# Allegro board FishTank-Manage.brd
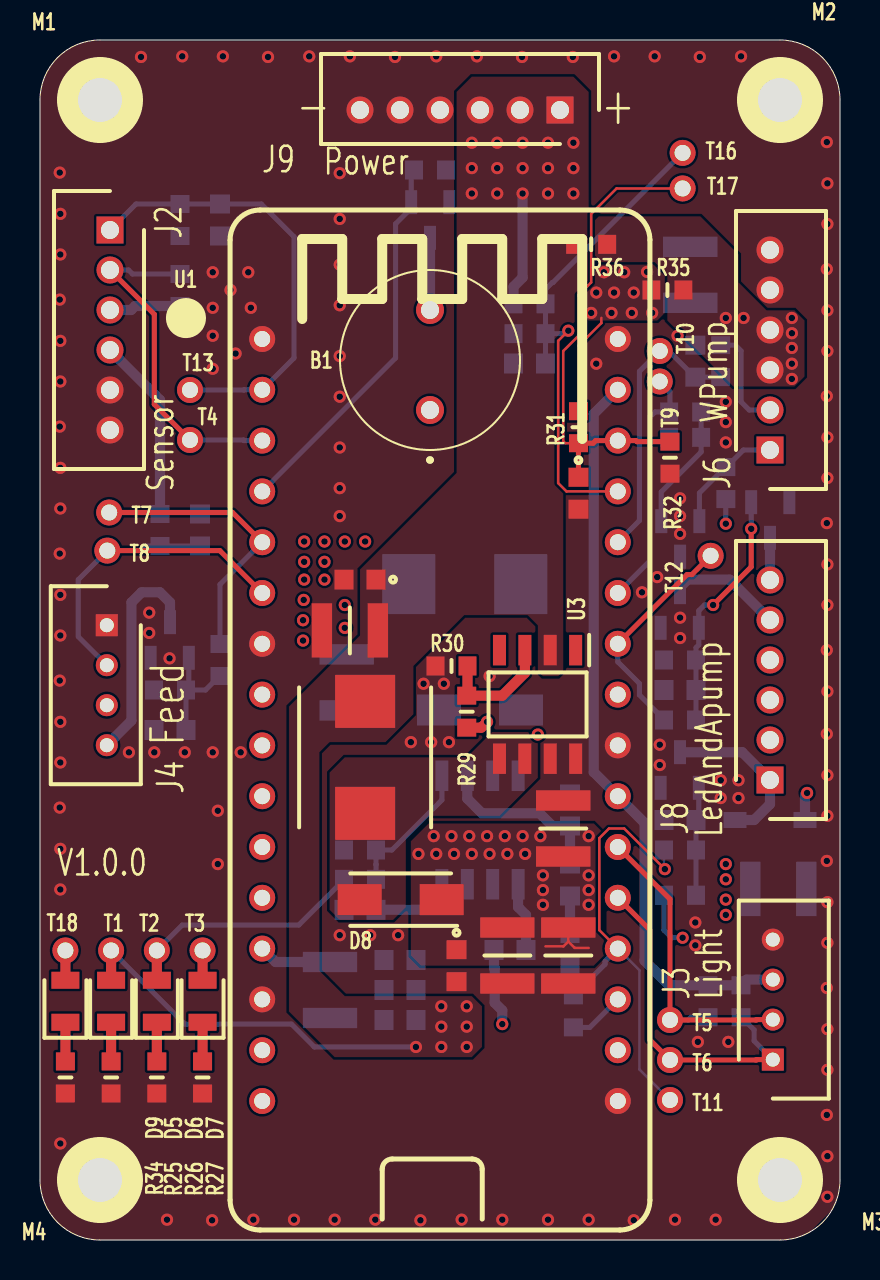
[diagram p0: board, top side]
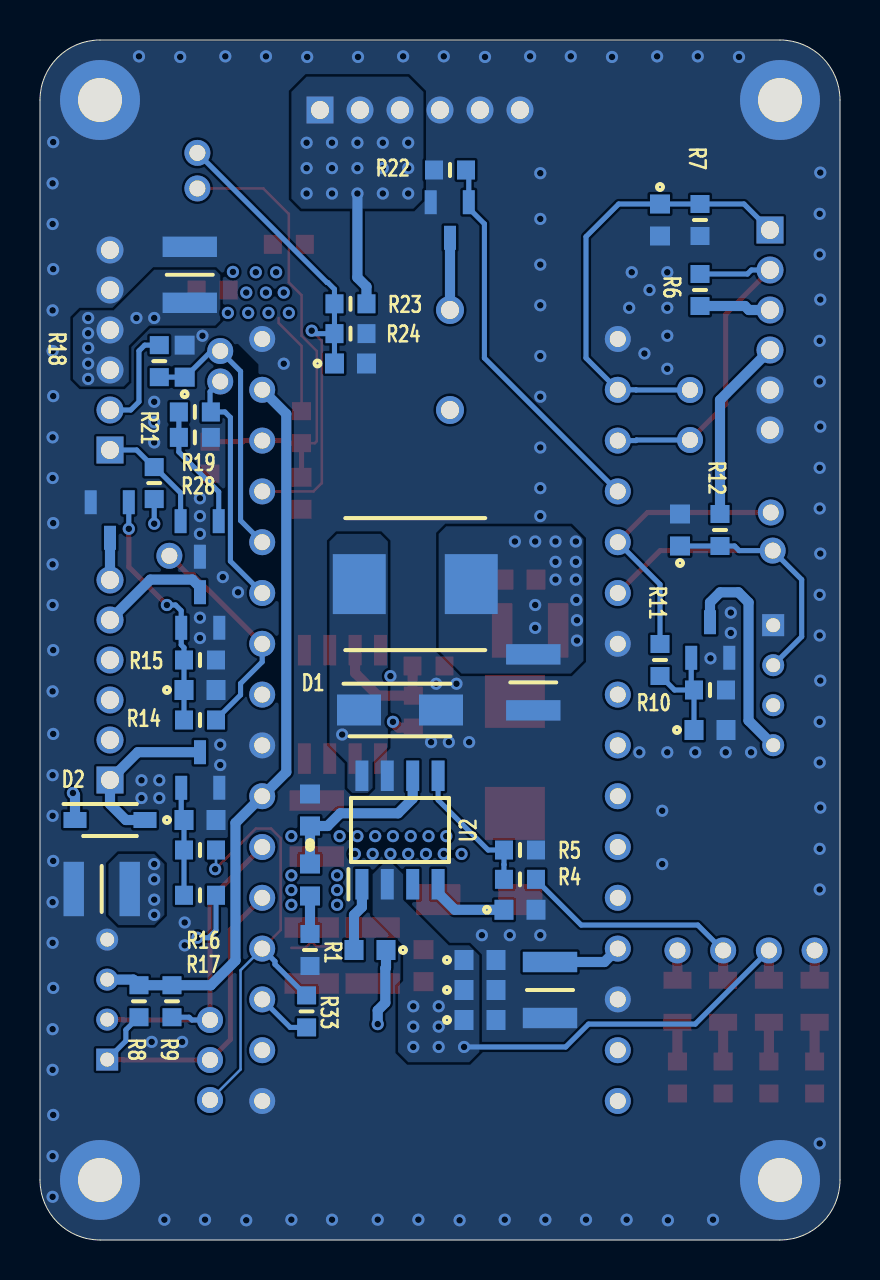
[diagram p1: board, bottom side, seen from below]

Outline 40 x 60 mm; copper layers: TOP, POW, GND, BOTTOM. Coordinates in mm from the lower left corner of the outline.
Outline path: 0,57 0,3 arc(0.88,0.88) 3,0 37,0 arc(39.12,0.88) 40,3 40,57 arc(39.12,59.12) 37,60 3,60 arc(0.88,59.12) 0,57

## Design rules (mm)
constraint set DEFAULT: min track width 0.127

## Placement (name value [footprint] x y rotation side)
B1  Buzz  [CST931AP]  19.5 42 0 top
C1  4.7uF  [C0603]  18 12.5 180 bottom
C2  4.7uF  [C0603]  18 14 180 bottom
C3  10nF  [C0603]  18 11 180 bottom
C4  10nF  [C0603]  16 16.51 180 bottom
C5  4.7uF  [C0603]  23.5 14.5 0 bottom
C6  4.7nF  [C0603]  26.5 18 270 bottom
C7  39pF  [C0603]  26.5 21.5 90 bottom
C8  100uF  [C1210]  15.34 27.88 270 bottom
C13  10uF  [C0603]  9 51 270 bottom
C14  4.7nF  [C0603]  6.5 25.5 180 bottom
C15  4.7nF  [C0603]  8 35.5 90 bottom
C17  4.7nF  [C0603]  32 27.5 180 bottom
C18  4.7nF  [C0603]  32 21 180 bottom
C19  100uF  [C1210]  32.51 48.26 90 bottom
C22  22uF  [C1210]  14.5 12.5 270 bottom
C23  100uF  [C1210]  36.91 17.55 0 bottom
C25  4.7nF  [C0603]  24.48 43.83 180 bottom
C26  100uF  [C1210]  23.37 14.22 270 top
C27  100uF  [C1210]  26.42 14.22 270 top
C28  100uF  [C1210]  26.16 20.57 90 top
C29  1uF  [C0603]  20.83 13.72 270 top
C30  100uF  [C1210]  15.49 30.48 180 top
C31  1uF  [C0603]  16 33.02 180 top
C32  4.7nF  [C0603]  26.92 37.34 270 top
C33  100nF  [C0603]  32.77 43.94 90 bottom
D1  S310  [DO-214AC]  22 26.5 180 bottom
D2  MBR0520  [SOD-123]  36.5 21 180 bottom
D5  LED  [LED-0805]  3.56 11.94 90 top
D6  LED  [LED-0805]  5.84 11.94 90 top
D7  LED  [LED-0805]  8.13 11.94 90 top
D8  S310  [DO-214AC]  18.03 17.02 180 top
D9  LED  [LED-0805]  1.27 11.94 90 top
J2  PH-6  [B6BPHKSLFSN]  3.5 50.5 90 top
J3  PH-4  [B4BPHKSLFSN]  36.64 9.02 270 top
J4  PH-4  [B4BPHKSLFSN]  3.34 30.74 90 top
J6  PH-6  [B6BPHKSLFSN]  36.5 39.5 270 top
J8  PH-6  [B6BPHKSLFSN]  36.5 23 270 top
J9  PH-6  [B6BPHKSLFSN]  26 56.5 0 top
L1  6.8uH  [H0630]  21.24 32.8 180 bottom
L2  6.8uH  [H0630]  16.26 24.13 270 top
M1  -  [M2]  3 57 0 top
M2  -  [M2]  37 57 0 top
M3  -  [M2]  37 3 0 top
M4  -  [M2]  3 3 0 top
NOREF  -  []  40 0 90 top
NOREF#2  -  []  3 3 90 top
NOREF#3  -  []  3 57 0 top
NOREF#4  -  []  0 0.99 0 top
Q1  MOSFET N  [SOT23]  6.5 30 90 bottom
Q2  MOSFET N  [SOT23]  32 31.5 90 bottom
Q3  MOSFET N  [SOT23]  32 23.5 90 bottom
Q4  MOSFET N  [SOT23]  19.5 51 270 bottom
Q5  MOSFET N  [SOT23]  36.5 36 270 bottom
Q6  MOSFET N  [SOT23]  32 35.05 270 bottom
R1  49.9K  [R0603]  26.5 14.5 270 bottom
R4  10K  [R0603]  16 18.03 180 bottom
R5  1.91K  [R0603]  16 19.5 0 bottom
R6  10K  [R0603]  7 47.5 270 bottom
R7  500K  [R0603]  7 51 90 bottom
R8  10K  [R0603]  35.05 11.94 270 bottom
R9  10K  [R0603]  33.4 11.94 270 bottom
R10  10K  [R0603]  6.5 27.5 0 bottom
R11  220R  [R0603]  9 29 90 bottom
R12  10K  [R0603]  6 35.5 90 bottom
R14  220R  [R0603]  32 26 180 bottom
R15  10K  [R0603]  32 29 0 bottom
R16  220R  [R0603]  32 19.5 180 bottom
R17  10K  [R0603]  32 17.24 180 bottom
R18  2K  [R0603]  34.04 43.94 270 bottom
R19  220R  [R0603]  32.26 41.4 180 bottom
R21  4.7K  [R0603]  34.29 37.85 270 bottom
R22  10K  [R0603]  19.5 53.5 0 bottom
R23  6.8K  [R0603]  24.48 46.81 180 bottom
R24  1K  [R0603]  24.48 45.32 0 bottom
R25  1K  [R0603]  3.56 8.13 90 top
R26  1K  [R0603]  5.84 8.13 90 top
R27  1K  [R0603]  8.13 8.13 90 top
R28  4.7K  [R0603]  32.26 40.13 0 bottom
R29  9.1K  [R0603]  21.34 26.42 90 top
R30  1K  [R0603]  20.57 28.7 180 top
R31  6.8K  [R0603]  26.92 40.64 90 top
R32  1K  [R0603]  31.5 39.12 90 top
R33  0R  [R0603]  26.67 11.43 90 bottom
R34  1K  [R0603]  1.27 8.13 90 top
R35  0R  [R0603]  31.37 47.5 180 top
R36  0R  [R0603]  27.56 49.78 180 top
T1  TestPoint  [TESTPOINT]  3.56 14.48 0 top
T2  TestPoint  [TESTPOINT]  5.84 14.48 0 top
T3  TestPoint  [TESTPOINT]  8.13 14.48 0 top
T4  TestPoint  [TESTPOINT]  7.5 40 0 top
T5  TestPoint  [TESTPOINT]  31.5 11 0 top
T6  TestPoint  [TESTPOINT]  31.5 9 0 top
T7  TestPoint  [TESTPOINT]  3.46 36.38 0 top
T8  TestPoint  [TESTPOINT]  3.37 34.47 0 top
T9  TestPoint  [TESTPOINT]  30.99 42.93 0 top
T10  TestPoint  [TESTPOINT]  30.99 44.45 0 top
T11  TestPoint  [TESTPOINT]  31.5 7 0 top
T12  TestPoint  [TESTPOINT]  33.53 34.21 0 top
T13  TestPoint  [TESTPOINT]  7.5 42.5 0 top
T16  TestPoint  [TESTPOINT]  32.13 54.36 0 top
T17  TestPoint  [TESTPOINT]  32.13 52.58 0 top
T18  TestPoint  [TESTPOINT]  1.27 14.48 0 top
U1  ESP32-C3  [ESP32C3_LUATOS]  20 26 0 top
U2  TPS54331  [SOIC-8]  22 20.5 90 bottom
U3  XL6007  [SOIC-8]  24.88 26.78 270 top

## Library data of the parts
B1 = Buzz
C1-C8 C13-C15 C17-C19 C22 C23 C25-C33 = CAP NP
D1 D2 D8 = DIODE_1
D5-D7 D9 = LED
J2 J6 J8 J9 = PH-6
J3 J4 = PH-4
L1 L2 = INDUCTOR IRON
M1-M4 = M2
Q1-Q6 = MOSFET N_0
R1 R4-R12 R14-R19 R21-R36 = R
T1-T13 T16-T18 = TestPoint
U1 = ESP32-C3
U2 = TPS54331
U3 = XL6007_3

## Footprints (pads in the part's own frame, mm; a bottom-side part is the same pattern mirrored in y, then rotated)
B4BPHKSLFSN
  rect 1.1x1.1 hole 0.7: 1(0,0)
  round 1.1 hole 0.7: 2(-2,0) 3(-4,0) 4(-6,0)
B6BPHKSLFSN
  rect 1.35x1.35 hole 0.9: 1(0,0)
  round 1.35 hole 0.9: 2(-2,0) 3(-4,0) 4(-6,0) 5(-8,0) 6(-10,0)
C0603
  rect 0.95x1 smd: 1(-0.8,0) 2(0.8,0)
C1210
  rect 1.02x2.72 smd: 1(-1.4,0) 2(1.4,0)
CST931AP
  round 1.4 hole 0.9: 1(0,-0.5) 2(0,4.5)
DO-214AC
  rect 2.2x1.55 smd: 1(-2.05,0) 2(2.05,0)
ESP32C3_LUATOS
  round 1.3 hole 0.8: 1(-8.89,19.05) 2(-8.89,16.51) 3(-8.89,13.97) 4(-8.89,11.43) 5(-8.89,8.89) 6(-8.89,6.35) 7(-8.89,3.81) 8(-8.89,1.27) 9(-8.89,-1.27) 10(-8.89,-3.81) 11(-8.89,-6.35) 12(-8.89,-8.89) 13(-8.89,-11.43) 14(-8.89,-13.97) 15(-8.89,-16.51) 16(-8.89,-19.05) 17(8.89,19.05) 18(8.89,16.51) 19(8.89,13.97) 20(8.89,11.43) 21(8.89,8.89) 22(8.89,6.35) 23(8.89,3.81) 24(8.89,1.27) 25(8.89,-1.27) 26(8.89,-3.81) 27(8.89,-6.35) 28(8.89,-8.89) 29(8.89,-11.43) 30(8.89,-13.97) 31(8.89,-16.51) 32(8.89,-19.05)
H0630
  rect 2.65x3 smd: 1(-2.8,0) 2(2.8,0)
LED-0805
  rect 0.85x1.4 smd: 1(-1.05,0) 2(1.05,0)
M2
  round 4 hole 2.2: 1(0,0)
R0603
  rect 0.9x0.95 smd: 1(-0.8,0) 2(0.8,0)
SOD-123
  rect 1.15x0.8 smd: 1(-1.75,0) 2(1.75,0)
SOIC-8
  rect 1.525x0.65 smd: 1(-2.712,1.905) 2(-2.712,0.635) 3(-2.712,-0.635) 4(-2.712,-1.905) 5(2.712,-1.905) 6(2.712,-0.635) 7(2.712,0.635) 8(2.712,1.905)
SOT23
  rect 1.2x0.6 smd: 1(-0.889,0.94) 2(-0.889,-0.965) 3(0.889,0)
TESTPOINT
  round 1.3 hole 0.8: 1(0,0)

## Nets
12V_ADC: C25.1 R23.1 R24.2 T16.1 U1.20
GND: C1.2 C2.2 C3.2 C4.2 C7.2 C8.2 C13.2 C14.2 C15.2 C17.2 C18.2 C19.2 C22.2 C23.2 C25.2 C26.2 C27.2 C28.2 C29.2 C30.2 C31.2 C32.2 C33.2 D1.2 J2.5 J2.6 J3.4 J4.1 J6.5 J6.6 J9.4 J9.5 J9.6 M1.1 M2.1 M3.1 M4.1 Q1.2(SOURCE) Q2.2(SOURCE) Q3.2(SOURCE) Q4.2(SOURCE) Q5.2(SOURCE) Q6.3 R1.2 R5.1 R7.1 R10.1 R15.1 R22.2 R24.1 R25.1 R26.1 R27.1 R28.1 R30.2 R32.1 R34.1 U1.1 U1.7 U1.14 U1.17 U1.25 U1.32 U2.7 U3.7 U3.8
VCC3V3: C22.1 D7.2 J2.3 J2.4 J3.3 R6.2 R8.1 R9.1 R12.2 T3.1 U1.13 U1.18 U1.26
VCC5V: B1.1 C8.1 D2.1 D6.2 J4.3 J8.2 L1.2 R4.2 R17.2 R21.2 T2.1 U1.16 U1.31
VCC12V: C1.1 C2.1 C3.1 C30.1 C31.1 D5.2 J9.1 J9.2 J9.3 L2.1 R23.2 R36.2 T1.1 U2.2 U3.2(VIN)
AIR_PUM_PWM: R16.2 R33.2 T11.1 U1.29
BUZZ_CONTROL: Q4.1 R22.1 U1.4
DS18B20: J2.2 R6.1 T4.1 U1.3
FEED_CONTROL: R11.2 T7.1 U1.5
FEED_RESET: C15.1 J4.2 R12.1 T8.1 U1.6
IIC_SCL: J3.2 R9.2 T5.1 U1.27
IIC_SDA: J3.1 R8.2 T6.1 U1.28
LED_PWM: R14.2 T12.1 U1.23
PUM_PWM: R19.2 T9.1 U1.22
PUM_SPEED: C33.1 R18.2 T10.1 U1.21
PUMPCONTROL: J6.1 Q6.2(SOURCE) R21.1
VUP12V: C23.1 C26.1 C27.1 C28.1 C29.1 D8.1 D9.2 J8.3 J8.4 R29.1 R31.2 R35.2 T18.1
VUP12V_ADC: C32.1 R31.1 R32.2 T17.1 U1.19
WATER_LEVEL_ADC: C13.1 J2.1 R7.2 T13.1 U1.2
N00981: C4.1 U2.4
N01360: C6.1 C7.1 U2.6
N01378: C6.2 R1.1
N01472: C5.2 U2.1
N01477: C5.1 D1.1 L1.1 U2.8
N02737: R4.1 R5.2 U2.5(VSNS)
N10626: J4.4 Q1.3
N11698: C14.1 Q1.1 R10.2 R11.1
N14311: C17.1 Q2.1 Q5.1 R14.1 R15.2
N15721: C18.1 Q3.1 R16.1 R17.1
N16322: D2.2 J8.1 Q3.3
N19801: C19.1 J6.3 J6.4 R35.1 R36.1
N19894: J6.2 R18.1
N26879: B1.2(-) Q4.3
N57468: D7.1(CATHODE) R27.2
N57601: D6.1(CATHODE) R26.2
N57605: D5.1(CATHODE) R25.2
N63054: J8.5 Q2.3
N63058: J8.6 Q5.3
N66173: Q6.1 R19.1 R28.2
N75938: D8.2 L2.2 U3.5 U3.6
N77562: R29.2 R30.1 U3.3
N85935: R33.1 U1.30
N86308: D9.1(CATHODE) R34.2

Pads without a net: U1 8 9 10 11 12 15 24; U2 3; U3 1 4

## Via types
v1: diameter 0.61, hole 0.33, TOP to BOTTOM, 219 vias

## Routing (per net, layer and track width the routed paths; a pad name or vN(x,y) marks a point on that pad's centre or on a via; arc(x,y) is an arc through that point)
12V_ADC: length 25.6
  TOP w0.127: v1(26.42,45.47) 25.91,44.96 25.91,37.85 26.32,37.43 U1.20
  BOTTOM w0.254: v1(26.42,45.47) 26.27,45.32 R24.2 ; R24.2 R23.1 25.28,47.54 25.62,47.88 25.65,47.88 T16.1 ; R24.2 C25.1
GND:
  vias: v1(0.99,53.37) v1(1.02,51.31) v1(1.02,49.28) v1(0.99,47.02) v1(1.02,44.96) v1(1.02,42.93) v1(0.99,40.67) v1(1.02,38.61) v1(1.02,36.58) v1(0.99,34.32) v1(1.02,32.26) v1(1.02,30.23) v1(0.99,27.97) v1(1.02,25.91) v1(1.02,23.88) v1(0.99,21.62) v1(1.02,19.56) v1(1.02,17.53) v1(1.02,4.83) v1(4.45,24.38) v1(5.05,59.15) v1(5.46,31.37) v1(5.46,30.35) v1(5.71,24.38) v1(6.35,1.02) v1(6.48,29.08) v1(7.11,59.18) v1(7.24,24.38) v1(8.64,48.39) v1(8.64,46.61) v1(8.64,45.21) v1(8.64,43.56) v1(8.64,24.38) v1(8.61,0.99) v1(8.89,21.46) v1(8.89,18.8) v1(9.14,59.18) v1(9.53,47.5) v1(9.78,44.32) v1(10.03,24.38) v1(10.41,48.39) v1(10.54,46.61) v1(10.67,1.02) v1(11.4,59.15) v1(12.7,1.02) v1(13.46,59.18) v1(14.73,1.02) v1(14.99,53.34) v1(14.99,51.05) v1(14.99,48.77) v1(14.99,46.74) v1(14.99,44.2) v1(14.99,42.16) v1(14.99,39.62) v1(14.99,37.59) v1(14.99,36.2) v1(14.99,15.24) v1(15.49,59.18) v1(16.51,15.24) v1(16.76,1.02) v1(17.75,59.15) v1(17.91,15.24) v1(18.54,24.89) v1(19.02,0.99) v1(19.18,27.81) v1(19.56,24.89) v1(19.81,59.18) v1(20.19,27.81) v1(20.45,24.89) v1(21.08,1.02) v1(21.84,59.18) v1(22.48,28.19) v1(23.11,1.02) v1(24.1,59.15) v1(25.4,1.02) v1(26.64,59.15) v1(27.43,1.02) v1(27.81,43.81) v1(28.7,59.18) v1(29.69,0.99) v1(30.1,32.38) v1(30.73,59.18) v1(30.86,33.15) v1(30.99,24.77) v1(30.99,23.75) v1(31.75,1.02) v1(31.88,45.21) v1(32,37.08) v1(32,36.2) v1(32,35.31) v1(32,31.11) v1(32,30.1) v1(32.77,15.88) v1(32.77,14.73) v1(32.89,9.91) v1(32.99,59.15) v1(33.78,1.02) v1(34.04,22.99) v1(34.04,22.1) v1(34.29,41.91) v1(34.29,40.89) v1(34.29,39.88) v1(34.42,9.91) v1(34.92,22.99) v1(34.92,22.1) v1(35.05,59.18) v1(39.34,54.89) v1(39.34,48.54) v1(39.34,42.19) v1(39.34,35.84) v1(39.34,29.49) v1(39.34,25.3) v1(39.34,18.95) v1(39.34,12.6) v1(39.34,6.25) v1(39.37,52.83) v1(39.37,50.8) v1(39.37,46.48) v1(39.37,44.45) v1(39.37,40.13) v1(39.37,38.1) v1(39.37,33.78) v1(39.37,31.75) v1(39.37,27.43) v1(39.37,23.24) v1(39.37,21.21) v1(39.37,16.89) v1(39.37,14.86) v1(39.37,10.54) v1(39.37,8.51) v1(39.37,4.19) v1(39.37,2.16)
VCC3V3: length 55.1
  TOP w0.508: T3.1 D7.2
  BOTTOM w0.508: U1.13 11.78,13.9 C22.1 ; R6.2 4.76,46.7 4.56,46.5 J2.3 ; J3.3 35.33,13.02 R8.1 R9.1 31.46,12.74 30.23,13.97 30.23,20.85 U1.26 27.69,23.39 27.69,41.31 U1.18 ; J2.4 6,42 R12.2
VCC5V: length 17.8
  TOP w0.508: T2.1 D6.2
  BOTTOM w0.254: R4.2 15.2,18.01 12.94,15.75 7.11,15.75 T2.1 ; R21.2 v1(34.29,35.81) ; v1(32.13,15.11) 31.57,15.11 31.2,15.49 R17.2
  BOTTOM w0.508: v1(38.35,22.35) 38.25,22.25 D2.1
  vias: v1(13.21,34.92) v1(13.21,33.91) v1(13.21,33.02) v1(13.18,32) v1(13.15,30.99) v1(13.15,29.97) v1(14.22,34.92) v1(14.22,33.91) v1(14.22,33.02) v1(15.24,34.92) v1(15.24,31.75) v1(15.24,30.61) v1(16.26,34.92)
VCC12V: length 24.4
  TOP w0.508: T1.1 D5.2
  BOTTOM w0.254: T1.1 7.24,10.79 12.57,10.79 13.72,9.65 v1(18.8,9.65)
  BOTTOM w0.508: v1(24.13,52.32) 24.13,48.12 23.68,47.67 R23.2
  vias: v1(20.07,11.68) v1(20.07,10.67) v1(20.07,9.65) v1(21.34,11.68) v1(21.34,10.67) v1(21.34,9.65) v1(21.59,54.86) v1(21.59,53.59) v1(21.59,52.32) v1(22.86,54.86) v1(22.86,53.59) v1(22.86,52.32) v1(24.13,54.86) v1(24.13,53.59) v1(25.4,54.86) v1(25.4,53.59) v1(25.4,52.32) v1(26.67,54.86) v1(26.67,53.59) v1(26.67,52.32)
AIR_PUM_PWM: length 23.1
  TOP w0.127: v1(31.24,18.54) 29.21,20.57 28.45,20.57 27.97,20.09 27.97,15.49 U1.29
  BOTTOM w0.127: v1(31.24,18.54) 31.2,18.58 R16.2 ; T11.1 29.97,8.53 29.97,13.49 U1.29
  BOTTOM w0.254: U1.29 28.25,13.93 28.25,13.79 26.7,12.23 R33.2
BUZZ_CONTROL: length 19.2
  BOTTOM w0.254: R22.1 18.56,53.36 Q4.1 18.56,51.59 17.78,50.81 17.78,44.1 U1.4
DS18B20: length 17.4
  TOP w0.254: J2.2 5.71,46.28 5.71,41.78 T4.1
  BOTTOM w0.254: T4.1 10.18,40 10.21,39.97 U1.3 ; R6.1 4.63,48.3 4.43,48.5 J2.2
FEED_CONTROL: length 14.2
  TOP w0.254: U1.5 9.62,36.38 T7.1
  BOTTOM w0.254: R11.2 9,32.78 U1.5
FEED_RESET: length 20.3
  TOP w0.254: T8.1 8.99,34.47 U1.6
  BOTTOM w0.254: J4.2 1.92,30.16 1.92,33.02 T8.1 5.04,34.47 5.27,34.7 R12.1 C15.1
IIC_SCL: length 16.8
  TOP w0.254: U1.27 31.5,17.04 T5.1 35.82,11 35.84,11.02 J3.2
  BOTTOM w0.254: T5.1 32.4,11 32.54,11.14 R9.2
IIC_SDA: length 17.1
  TOP w0.254: U1.28 30.48,15.52 30.48,10.02 T6.1 35.82,9 35.84,9.02 J3.1
  BOTTOM w0.254: J3.1 35.71,9.95 35.71,10.51 35.08,11.14 R8.2
LED_PWM: length 11.2
  TOP w0.254: T12.1 32.6,33.27 32.35,33.27 U1.23
  BOTTOM w0.254: R14.2 31.2,26.02 29.97,27.25 29.97,27.82 28.89,28.91 U1.23
PUM_PWM: length 12.3
  BOTTOM w0.254: T9.1 31.5,42.42 31.5,41.44 R19.2 30.75,41.4 30.48,41.13 30.48,33.94 U1.22
PUM_SPEED: length 14
  BOTTOM w0.254: R18.2 C33.1 32.74,43.14 31.43,44.45 T10.1 29.97,43.43 29.97,35.97 U1.21
PUMPCONTROL: length 5.8
  BOTTOM w0.254: Q6.2 32.97,37.35 34.27,38.65 R21.1 34.31,38.65 35.17,39.5 J6.1
VUP12V: length 32
  TOP w0.127: 26.42,14.92 26.73,14.61 27.43,14.61 ; 26.42,14.92 C27.1 ; 26.42,14.92 26.17,14.68 25.27,14.68 ; 28.07,46.1 28.07,45.85 26.92,44.7 R31.2
  TOP w0.508: T18.1 D9.2 ; v1(22.35,25.91) 22.06,25.62 R29.1
  GND w0.254: T18.1 7.38,20.59 19.29,20.59 v1(19.68,20.19)
  vias: v1(18.92,19.3) v1(19.81,19.3) v1(20.57,20.19) v1(20.7,19.3) v1(21.46,20.19) v1(21.59,19.3) v1(22.35,20.19) v1(22.48,19.3) v1(23.24,20.19) v1(23.37,19.3) v1(24.13,20.19) v1(24.26,19.3) v1(25.02,20.19) v1(25.15,18.23) v1(25.15,17.5) v1(25.15,16.76) v1(27.43,20.19) v1(27.43,18.23) v1(27.43,17.5) v1(27.43,16.76) v1(27.56,46.35) v1(27.81,47.37) v1(28.19,48.39) v1(28.57,46.35) v1(28.7,47.37) v1(29.21,48.39) v1(29.59,46.35) v1(29.69,47.37) v1(30.35,48.4) v1(30.61,46.35) v1(34.29,18.8) v1(34.29,18.03) v1(34.29,17.02) v1(34.29,16.26)
VUP12V_ADC: length 24.2
  TOP w0.127: R31.1 26.26,39.84 26.16,39.94 26.16,44.45 26.92,45.21 26.92,47.24 27.56,47.88 27.56,51.31 28.83,52.58 T17.1
  TOP w0.254: R32.2 29.85,39.92 29.79,39.97 U1.19 27.78,39.97 27.65,39.84 R31.1 C32.1
WATER_LEVEL_ADC: length 22.3
  BOTTOM w0.254: T13.1 10.2,42.5 10.21,42.51 U1.2 12.7,44.1 12.7,50.16 11.06,51.8 C13.1 R7.2 4.8,51.8 J2.1
N00981: length 4.1
  BOTTOM w0.508: C4.1 19.25,16.51 20.09,17.35 U2.4
N01360: length 8.7
  BOTTOM w0.508: U2.6 21.36,22.07 22.1,21.34 24.98,21.34 25.62,20.7 C7.1 C6.1
N01378: length 1.9
  BOTTOM w0.508: R1.1 C6.2
N01472: length 3.5
  BOTTOM w0.508: C5.2 24.3,16.25 23.91,16.64 U2.1
N01477: length 21.3
  GND w0.508: v1(23.11,10.79) 25.15,10.79 26.16,11.81 26.16,23.11 24.89,24.38 v1(24.89,25.27)
  BOTTOM w0.508: v1(23.11,10.79) 23.11,11.48 22.73,11.86 22.73,13.59 22.7,13.62 C5.1
N02737: length 7
  BOTTOM w0.254: U2.5 20.09,22 17.59,19.5 R5.2 16.8,18.77 16.8,18.77 R4.1
  BOTTOM w0.508: 16.8,18.04 R4.1
N10626: length 11
  BOTTOM w0.508: Q1.3 6.5,31.88 5.99,32.38 5.08,32.38 4.57,31.88 4.57,25.97 J4.4
N11698: length 5.7
  BOTTOM w0.254: R10.2 8.28,27.5 8.97,28.2 R11.1 ; R10.2 C14.1 ; R10.2 7.44,27.64 Q1.1
N14311: length 12.3
  TOP w0.254: v1(35.56,35.56) 35.56,33.66 v1(33.66,31.75)
  BOTTOM w0.254: R14.1 C17.1 R15.2 32.8,29.62 32.94,29.76 Q2.1 32.94,31.46 33.22,31.75 v1(33.66,31.75) ; Q5.1 v1(35.56,35.56)
N15721: length 5.4
  BOTTOM w0.254: R17.1 R16.1 C18.1 32.94,21.14 Q3.1
N16322: length 8.4
  BOTTOM w0.508: D2.2 35.71,21 36.5,21.79 J8.1 35.11,24.39 Q3.3
N19801:
  vias: v1(34.29,46.1) v1(35.18,46.1) v1(37.59,46.1) v1(37.59,45.34) v1(37.59,44.6) v1(37.59,43.81) v1(37.59,43.05)
N19894: length 5.3
  BOTTOM w0.254: J6.2 35.46,41.5 35.05,41.91 35.05,44.45 34.77,44.74 R18.1
N26879: length 3.6
  BOTTOM w0.508: Q4.3 B1.2
N57468: length 2
  TOP w0.508: D7.1 R27.2
N57601: length 2
  TOP w0.508: D6.1 R26.2
N57605: length 2
  TOP w0.508: D5.1 R25.2
N63054: length 5.7
  BOTTOM w0.508: J8.5 34.48,33.02 32.38,33.02 32,32.63 Q2.3
N63058: length 2.1
  BOTTOM w0.508: Q5.3 J8.6
N66173: length 6.3
  BOTTOM w0.254: R19.1 R28.2 33.06,39.4 31.06,37.41 Q6.1
N77562: length 6
  TOP w0.508: R30.1 21.37,27.25 R29.2 23.11,27.22 24.24,28.35 U3.3
N85935: length 2.8
  BOTTOM w0.254: U1.30 27.49,10.63 R33.1
N86308: length 2
  TOP w0.508: D9.1 R34.2

## Copper pours and planes (outline as drawn; the poured copper is in the pictures)
GND on TOP: 0,57 0.68,58.91 2.42,59.94 37.58,59.94 39.32,58.91 40,57 40,3 39.9,2.22 39.6,1.5 38.5,0.4 37.78,0.1 37,0 3,0 0.88,0.88 0,3 ; 3 cut-outs
GND on BOTTOM: 1.32,59.48 1.85,59.77 2.42,59.94 37.58,59.94 39.32,58.91 40,57 40,3 39.12,0.88 37,0 3,0 1.99,0.18 1.1,0.68 0.68,1.1 0.18,1.99 0,3 0,57 0.13,57.88 0.52,58.68 ; 7 cut-outs
GND on GND: 0,57 0.88,59.12 3,60 37,60 39.12,59.12 40,57 40,3 39.12,0.88 37,0 3,0 0.88,0.88 0,3
VCC3V3 on POW: 8.38,47.5 3.05,47.5 2.03,46.48 2.03,38.35 7.11,33.27 7.11,13.97 9.65,11.43 37.08,11.43 37.59,11.94 37.59,13.72 37.08,14.22 13.97,14.22 9.91,18.29 9.91,45.97
VCC5V on BOTTOM: 13.46,35.69 19.68,35.69 20.07,35.31 20.07,29.46 18.92,28.32 13.46,28.32 12.83,28.96 12.83,35.05
VCC5V on POW: 1.32,59.48 1.85,59.77 2.42,59.94 37.58,59.94 37.99,59.83 38.38,59.66 39.66,58.38 39.91,57.71 40,57 40,3 39.12,0.88 37,0 3,0 1.99,0.18 1.1,0.68 0.68,1.1 0.18,1.99 0,3 0,57 0.13,57.88 0.52,58.68
VCC12V on TOP: 21.59,58.17 20.83,57.4 20.83,38.35 16,33.53 16,30.23 12.45,26.67 12.45,11.43 14.73,9.14 21.59,9.14 22.1,9.65 22.1,11.68 21.59,12.19 15.24,12.19 13.97,13.46 13.97,24.38 14.48,24.89 17.27,24.89 18.67,26.29 18.67,28.7 21.21,31.24 24.38,31.24 24.89,30.73 24.89,28.45 25.15,28.19 25.91,28.19 26.16,28.45 26.16,45.34 27.43,46.61 27.43,57.4 26.67,58.17 ; 1 cut-out
VCC12V on BOTTOM: 22.86,18.8 22.35,18.8 21.84,18.29 21.84,17.02 19.56,14.73 18.54,14.73 18.03,14.22 18.03,9.4 18.54,8.89 21.59,8.89 22.1,9.4 22.1,12.7 21.84,12.95 21.84,14.73 23.37,16.26 23.37,18.29
VCC12V on BOTTOM: 21.59,58.17 20.83,57.4 20.83,52.07 21.34,51.56 26.92,51.56 27.43,52.07 27.43,57.4 26.67,58.17
VCC12V on POW: 26.67,58.17 21.59,58.17 20.83,57.4 20.83,52.07 21.34,51.56 26.92,51.56 27.43,52.07 27.43,57.4
VUP12V on TOP: 27.69,20.83 19.43,20.83 18.54,19.94 18.54,14.22 19.05,13.72 27.69,13.72 28.19,14.22 28.19,20.32
VUP12V on TOP: 30.73,48.77 28.07,48.77 27.56,48.26 27.56,47.88 27.05,47.37 27.05,46.35 27.43,45.97 30.86,45.97 31.24,46.35 31.24,48.26
VUP12V on BOTTOM: 36.58,16.26 36.58,18.8 36.07,19.3 34.29,19.3 33.78,18.8 33.78,16.26 34.29,15.75 36.07,15.75
VUP12V on POW: 20.57,15.49 27.69,15.49 28.19,16 30.23,16 30.73,15.49 35.31,15.49 35.81,16 35.81,19.56 33.02,22.35 33.02,24.89 34.29,26.16 36.83,26.16 37.59,26.92 37.59,29.21 36.83,29.97 34.54,29.97 33.27,31.24 33.27,47.5 32.26,48.51 27.43,48.51 26.16,47.24 26.16,31.24 18.54,23.62 18.54,17.53
N01477 on BOTTOM: 25.15,35.31 22.99,35.31 22.61,34.92 22.61,24.64 23.37,23.88 23.37,22.61 23.62,22.35 24.38,22.35 24.64,22.61 24.64,23.88 25.53,24.77 25.53,34.92
N19801 on TOP: 33.02,51.18 27.94,51.18 27.56,50.8 27.56,49.4 28.07,48.9 30.73,48.9 31.37,48.26 31.37,45.97 34.67,42.67 37.72,42.67 38.23,43.18 38.23,45.97 37.72,46.48 36.32,46.48 34.92,47.88 34.92,49.28
N19801 on BOTTOM: 31.24,48.51 30.99,48.26 30.99,45.97 31.24,45.72 34.54,45.72 35.56,44.7 35.56,42.93 35.81,42.67 37.97,42.67 38.35,43.05 38.35,46.1 37.97,46.48 36.32,46.48 34.29,48.51
N19801 on POW: 37.72,42.55 36.07,42.55 35.56,43.05 35.56,44.45 35.18,44.83 33.91,44.83 33.53,45.21 33.53,46.23 33.78,46.48 37.59,46.48 38.23,45.85 38.23,43.05
N75938 on TOP: 14.48,23.37 14.48,16.51 14.99,16 17.65,16 18.29,16.64 18.29,20.07 19.43,21.21 22.99,21.21 24.89,23.11 24.89,25.15 24.64,25.4 22.61,25.4 21.34,24.13 15.24,24.13

## Text on the board
Ref Des/Silkscreen Top: V1.0.0 | Power | Sensor | LedAndApump | Light | WPump | Feed | - | +
PLACE_BOUND_BOTTOM: FIGURE | FINISHED_SIZE | 0.3302 | 0.7 | 0.8 | 0.9 | 2.2 | DRILL CHART: TOP to BOTTOM | ALL UNITS ARE IN MILLIMETERS | PLATED | QTY | 219 | 2 | 6 | 48 | 20 | 4
